# EAGLE board SparkFun_HX711_Load_Cell_Panel_v10 (EAGLE 6.6.0), part 1 of 3
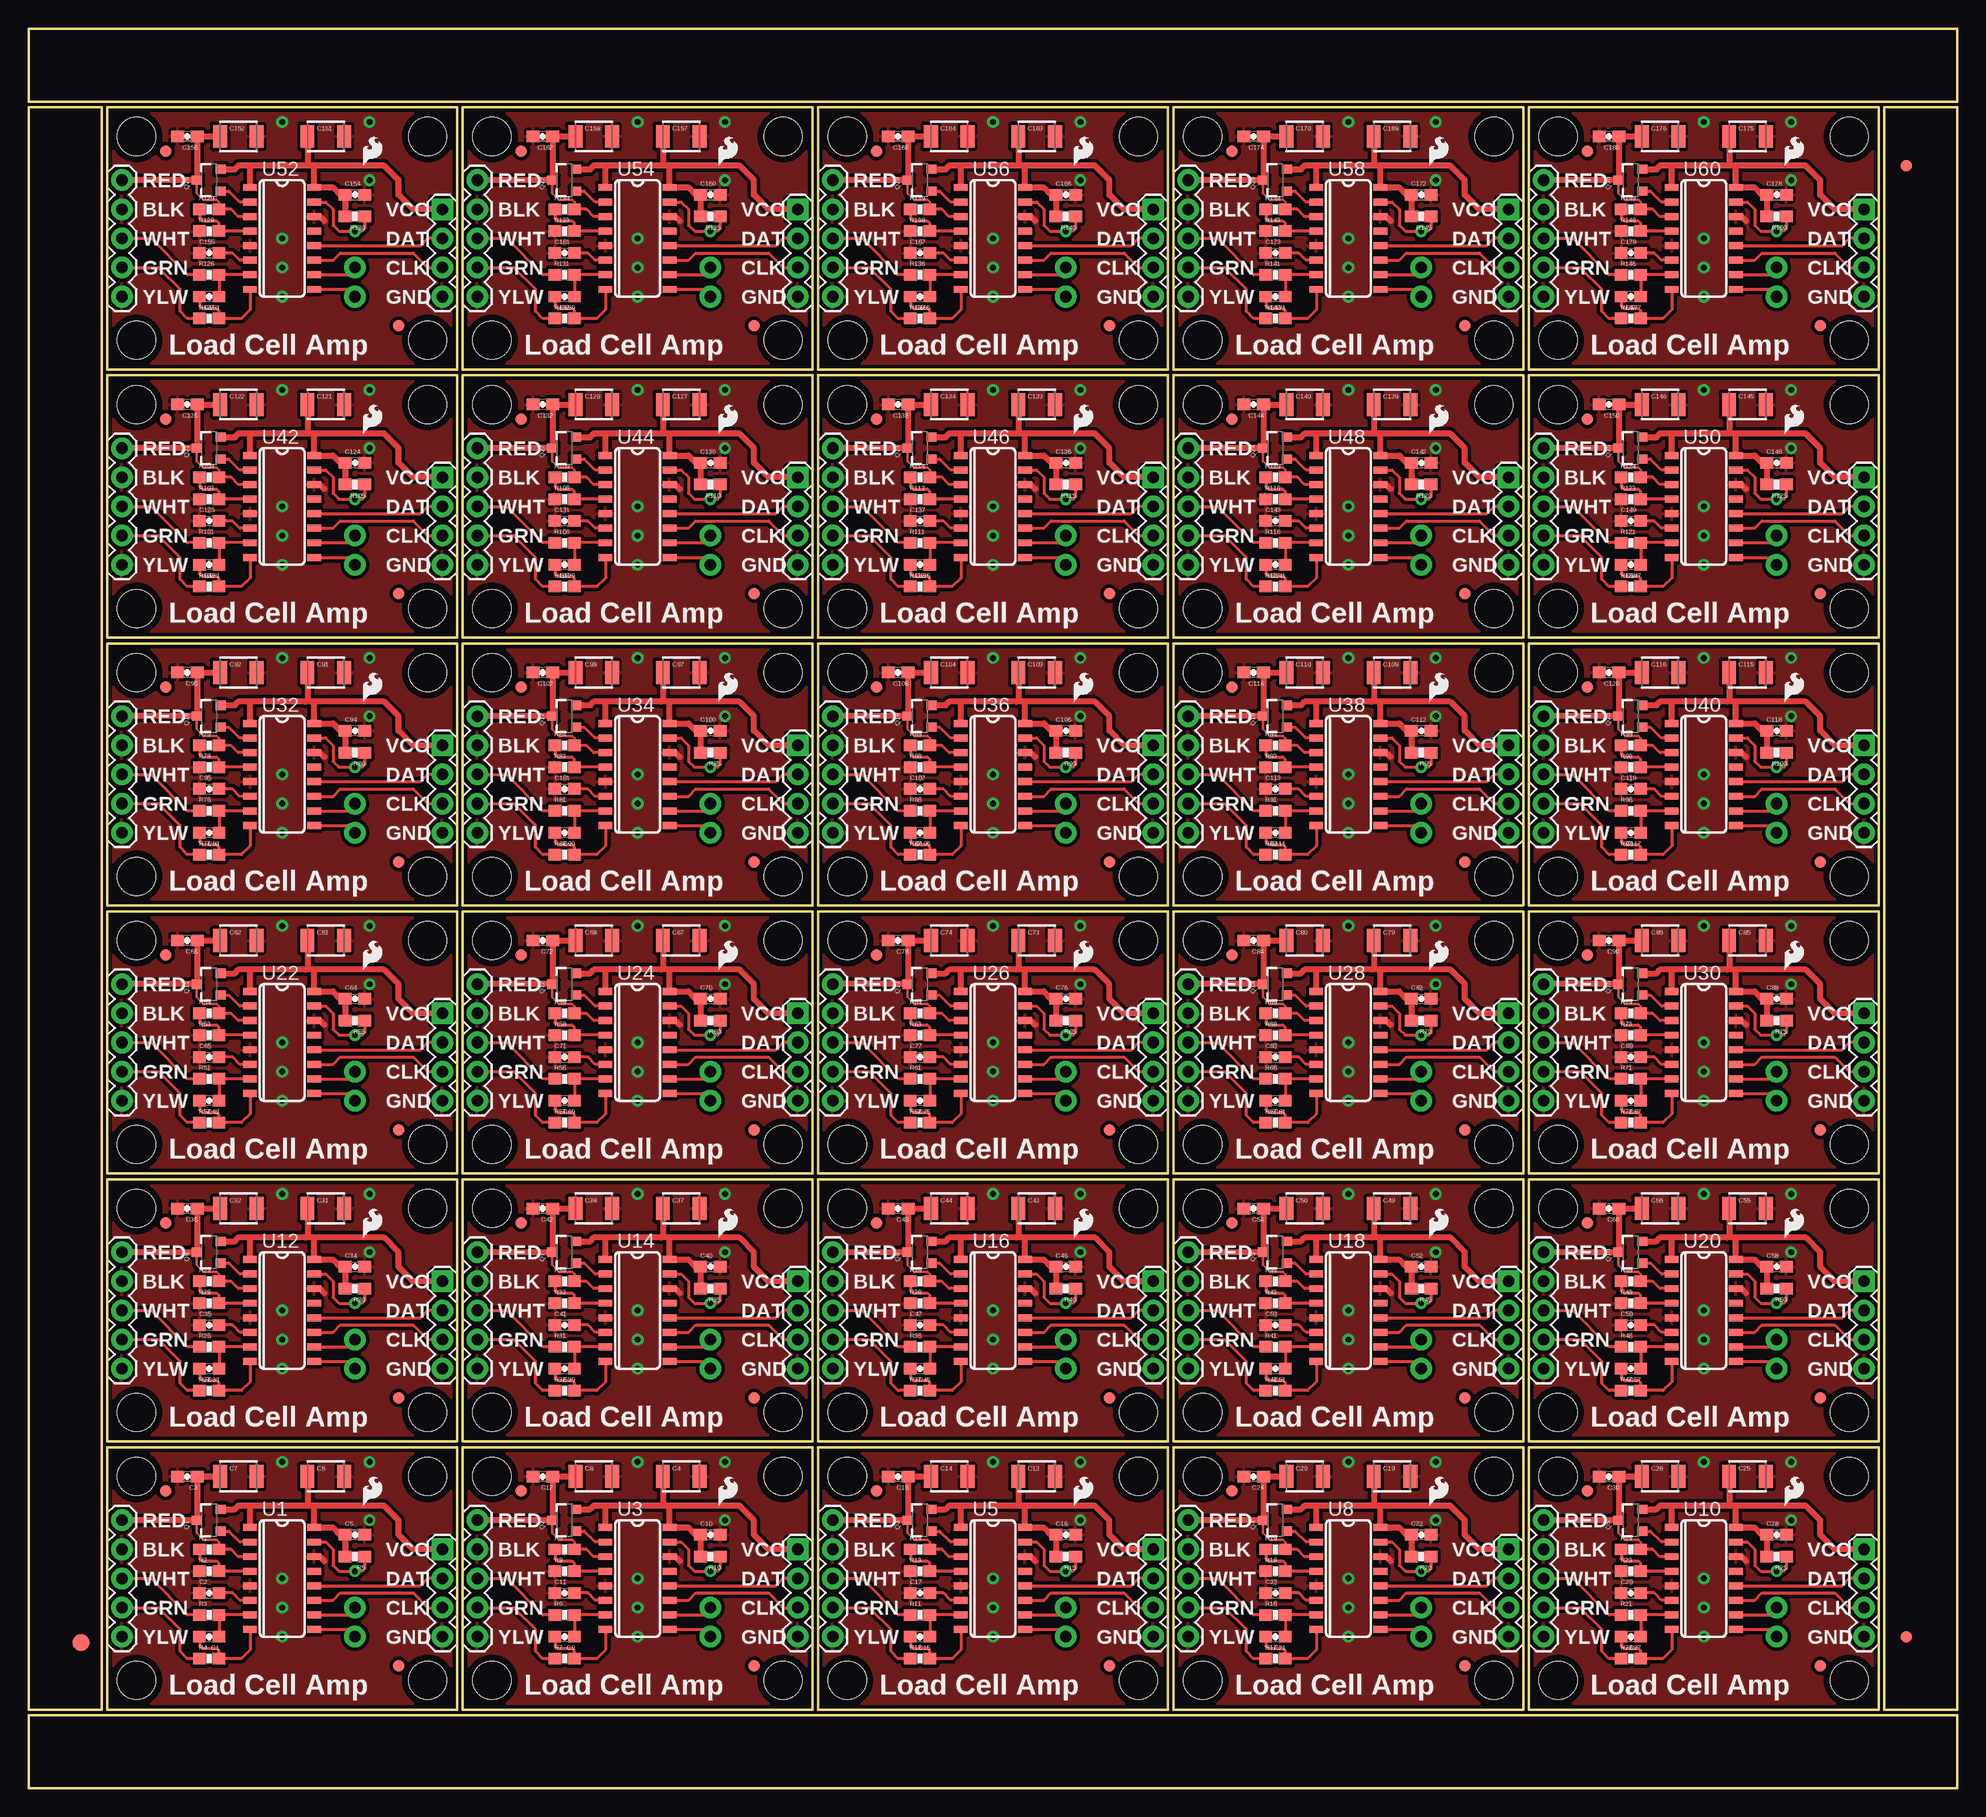
[diagram p0: board, top side]
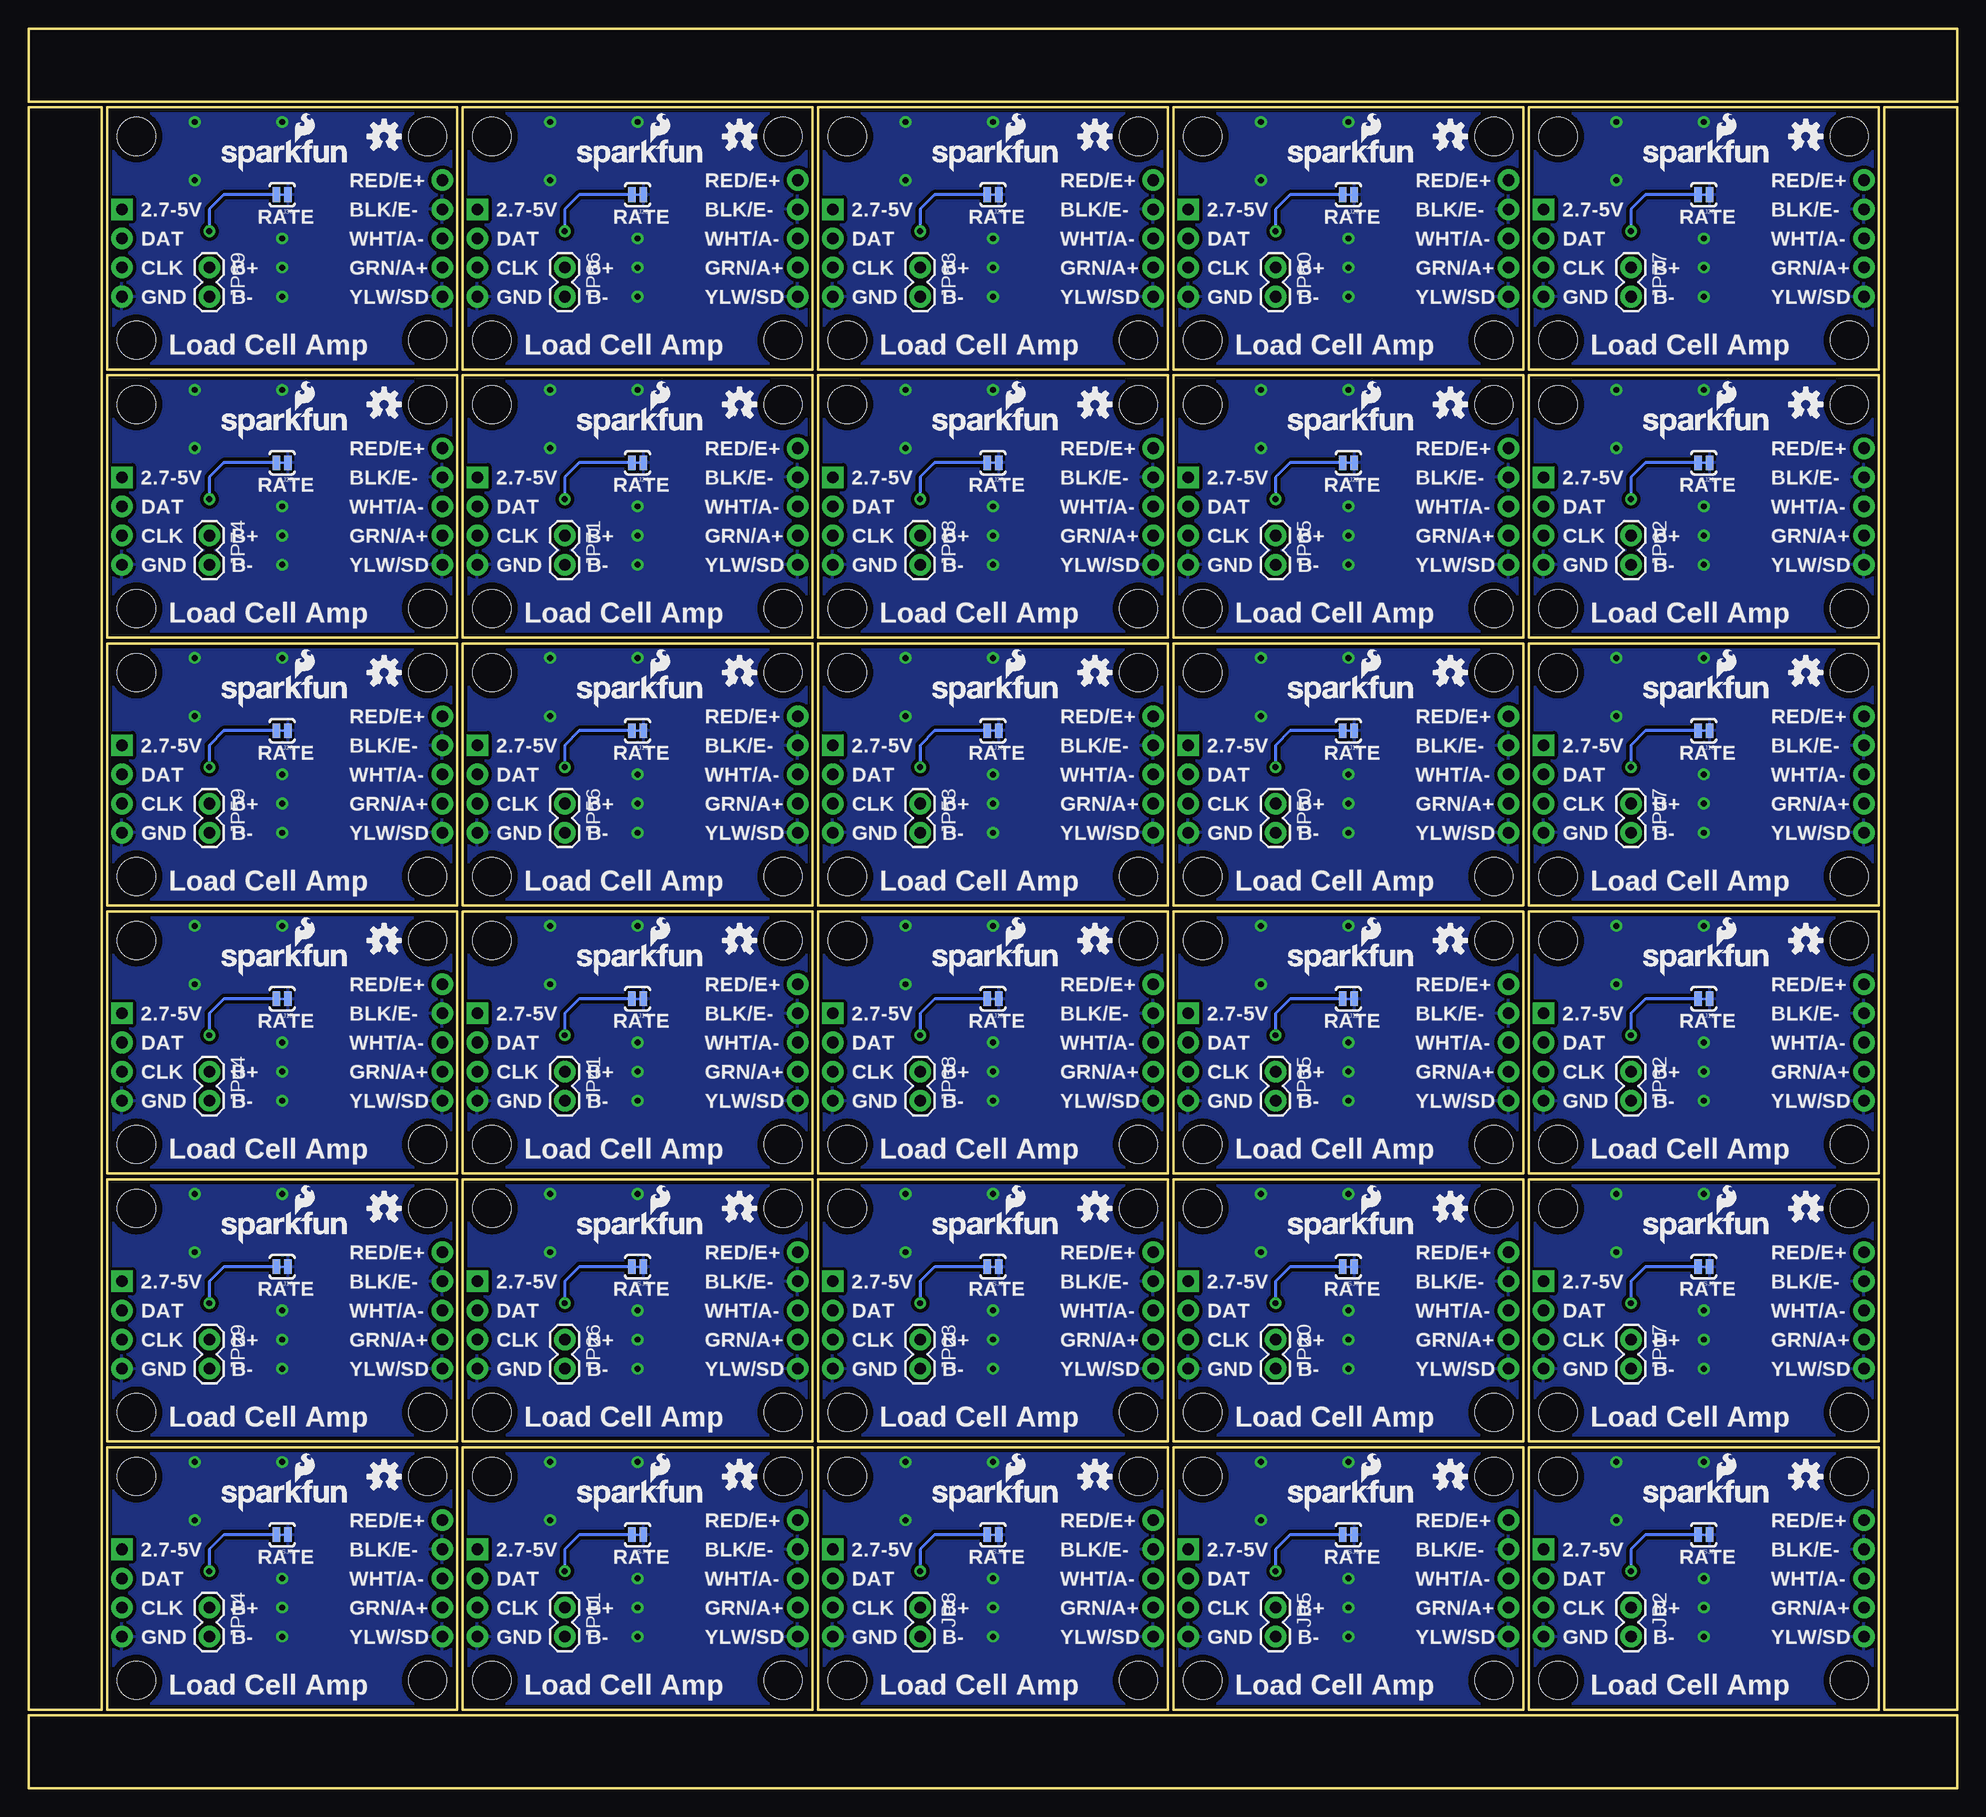
[diagram p1: board, bottom side, seen from below]

Size 168.15 x 153.42 mm. Coordinates in mm from the lower left corner, seen from the top.
Outline: 6.86,29.72 37.34,29.72 37.34,6.86 6.86,6.86 6.86,29.72
Outline: 37.85,29.72 68.33,29.72 68.33,6.86 37.85,6.86 37.85,29.72
Outline: 68.83,29.72 99.31,29.72 99.31,6.86 68.83,6.86 68.83,29.72
Outline: 99.82,29.72 130.3,29.72 130.3,6.86 99.82,6.86 99.82,29.72
Outline: 130.81,29.72 161.29,29.72 161.29,6.86 130.81,6.86 130.81,29.72
Outline: 6.86,53.09 37.34,53.09 37.34,30.23 6.86,30.23 6.86,53.09
Outline: 37.85,53.09 68.33,53.09 68.33,30.23 37.85,30.23 37.85,53.09
Outline: 68.83,53.09 99.31,53.09 99.31,30.23 68.83,30.23 68.83,53.09
Outline: 99.82,53.09 130.3,53.09 130.3,30.23 99.82,30.23 99.82,53.09
Outline: 130.81,53.09 161.29,53.09 161.29,30.23 130.81,30.23 130.81,53.09
Outline: 6.86,76.45 37.34,76.45 37.34,53.59 6.86,53.59 6.86,76.45
Outline: 37.85,76.45 68.33,76.45 68.33,53.59 37.85,53.59 37.85,76.45
Outline: 68.83,76.45 99.31,76.45 99.31,53.59 68.83,53.59 68.83,76.45
Outline: 99.82,76.45 130.3,76.45 130.3,53.59 99.82,53.59 99.82,76.45
Outline: 130.81,76.45 161.29,76.45 161.29,53.59 130.81,53.59 130.81,76.45
Outline: 6.86,99.82 37.34,99.82 37.34,76.96 6.86,76.96 6.86,99.82
Outline: 37.85,99.82 68.33,99.82 68.33,76.96 37.85,76.96 37.85,99.82
Outline: 68.83,99.82 99.31,99.82 99.31,76.96 68.83,76.96 68.83,99.82
Outline: 99.82,99.82 130.3,99.82 130.3,76.96 99.82,76.96 99.82,99.82
Outline: 130.81,99.82 161.29,99.82 161.29,76.96 130.81,76.96 130.81,99.82
Outline: 6.86,123.19 37.34,123.19 37.34,100.33 6.86,100.33 6.86,123.19
Outline: 37.85,123.19 68.33,123.19 68.33,100.33 37.85,100.33 37.85,123.19
Outline: 68.83,123.19 99.31,123.19 99.31,100.33 68.83,100.33 68.83,123.19
Outline: 99.82,123.19 130.3,123.19 130.3,100.33 99.82,100.33 99.82,123.19
Outline: 130.81,123.19 161.29,123.19 161.29,100.33 130.81,100.33 130.81,123.19
Outline: 6.86,146.56 37.34,146.56 37.34,123.7 6.86,123.7 6.86,146.56
Outline: 37.85,146.56 68.33,146.56 68.33,123.7 37.85,123.7 37.85,146.56
Outline: 68.83,146.56 99.31,146.56 99.31,123.7 68.83,123.7 68.83,146.56
Outline: 99.82,146.56 130.3,146.56 130.3,123.7 99.82,123.7 99.82,146.56
Outline: 130.81,146.56 161.29,146.56 161.29,123.7 130.81,123.7 130.81,146.56
Outline: 6.35,6.86 6.35,146.56 0,146.56 0,6.86 6.35,6.86
Outline: 0,6.35 0,0 168.15,0 168.15,6.35 0,6.35
Outline: 168.15,6.86 168.15,146.56 161.8,146.56 161.8,6.86 168.15,6.86
Outline: 168.15,147.07 168.15,153.42 0,153.42 0,147.07 168.15,147.07
Copper layers (1*16): Top 0.035mm / dielectric 1.5mm / Bottom 0.035mm
Design rules "default *": minimum track width 8mil, minimum drill 20mil, track to track 8mil, track to pad 8mil, pad to pad 8mil, via to via 8mil, smd to smd 8mil, copper to edge 8mil, drill to drill 8mil, minimum pad ring 12mil, minimum via ring 10mil, stop-mask expansion 4mil, vias tented up to drill 20mil, thermal gap 10mil

## Footprints (pad centres in the part's own frame; a part is rotated, then mirrored left to right if it is on the bottom)
0603-CAP = smd 1.1 x 1: 1 -0.85,0; 2 0.85,0
1210 = smd 1.2 x 2: 1 -1.6,0; 2 1.6,0
FIDUCIAL-1.5X3 = smd 1.5 x 1.5: 1 0,0
FIDUCIAL-1X2 = smd 1 x 1: 1 0,0
1X04 = drill 1.016 pad 1.88 square: 1 0,0 | drill 1.016 pad 1.88: 2 2.54,0; 3 5.08,0; 4 7.62,0
1X02 = drill 1.016 pad 1.88: 1 0,0; 2 2.54,0
1X05 = drill 1.016 pad 1.88: 1 0,0; 2 2.54,0; 3 5.08,0; 4 7.62,0; 5 10.16,0
SOT23-3 = smd 0.8 x 0.9: 1 -0.95,-1; 2 0.95,-1; 3 0,1.1
0603-RES = smd 1.1 x 1: 1 -0.85,0; 2 0.85,0
PAD-JUMPER-2-NC_BY_TRACE_YES_SILK = smd 0.635 x 1.27: 1 -0.508,0; 2 0.508,0
STAND-OFF = hole 3.302: 0,0
SO16 = smd 0.6 x 1.2: 1 -4.445,-2.8; 2 -3.175,-2.8; 3 -1.905,-2.8; 4 -0.635,-2.8; 5 0.635,-2.8; 6 1.905,-2.8; 7 3.175,-2.8; 8 4.445,-2.8; 9 4.445,2.8; 10 3.175,2.8; 11 1.905,2.8; 12 0.635,2.8; 13 -0.635,2.8; 14 -1.905,2.8; 15 -3.175,2.8; 16 -4.445,2.8

## Placement (x,y rotation side)
C1  0.1uF  [0603-CAP]  15.75,13.21 180 top
C2  0.1uF  [0603-CAP]  15.75,17.02 0 top
C3  0.1uF  [0603-CAP]  13.84,27.18 180 top
C4  10uF  [1210]  56.9,27.18 0 top
C5  0.1uF  [0603-CAP]  28.45,22.1 0 top
C6  10uF  [1210]  25.91,27.18 0 top
C7  10uF  [1210]  18.29,27.18 0 top
C8  10uF  [1210]  49.28,27.18 0 top
C9  0.1uF  [0603-CAP]  46.74,13.21 180 top
C10  0.1uF  [0603-CAP]  59.44,22.1 0 top
C11  0.1uF  [0603-CAP]  46.74,17.02 0 top
C12  0.1uF  [0603-CAP]  44.83,27.18 180 top
C13  10uF  [1210]  87.88,27.18 0 top
C14  10uF  [1210]  80.26,27.18 0 top
C15  0.1uF  [0603-CAP]  77.72,13.21 180 top
C16  0.1uF  [0603-CAP]  90.42,22.1 0 top
C17  0.1uF  [0603-CAP]  77.72,17.02 0 top
C18  0.1uF  [0603-CAP]  75.82,27.18 180 top
C19  10uF  [1210]  118.87,27.18 0 top
C20  10uF  [1210]  111.25,27.18 0 top
C21  0.1uF  [0603-CAP]  108.71,13.21 180 top
C22  0.1uF  [0603-CAP]  121.41,22.1 0 top
C23  0.1uF  [0603-CAP]  108.71,17.02 0 top
C24  0.1uF  [0603-CAP]  106.81,27.18 180 top
C25  10uF  [1210]  149.86,27.18 0 top
C26  10uF  [1210]  142.24,27.18 0 top
C27  0.1uF  [0603-CAP]  139.7,13.21 180 top
C28  0.1uF  [0603-CAP]  152.4,22.1 0 top
C29  0.1uF  [0603-CAP]  139.7,17.02 0 top
C30  0.1uF  [0603-CAP]  137.79,27.18 180 top
C31  10uF  [1210]  25.91,50.55 0 top
C32  10uF  [1210]  18.29,50.55 0 top
C33  0.1uF  [0603-CAP]  15.75,36.58 180 top
C34  0.1uF  [0603-CAP]  28.45,45.47 0 top
C35  0.1uF  [0603-CAP]  15.75,40.39 0 top
C36  0.1uF  [0603-CAP]  13.84,50.55 180 top
C37  10uF  [1210]  56.9,50.55 0 top
C38  10uF  [1210]  49.28,50.55 0 top
C39  0.1uF  [0603-CAP]  46.74,36.58 180 top
C40  0.1uF  [0603-CAP]  59.44,45.47 0 top
C41  0.1uF  [0603-CAP]  46.74,40.39 0 top
C42  0.1uF  [0603-CAP]  44.83,50.55 180 top
C43  10uF  [1210]  87.88,50.55 0 top
C44  10uF  [1210]  80.26,50.55 0 top
C45  0.1uF  [0603-CAP]  77.72,36.58 180 top
C46  0.1uF  [0603-CAP]  90.42,45.47 0 top
C47  0.1uF  [0603-CAP]  77.72,40.39 0 top
C48  0.1uF  [0603-CAP]  75.82,50.55 180 top
C49  10uF  [1210]  118.87,50.55 0 top
C50  10uF  [1210]  111.25,50.55 0 top
C51  0.1uF  [0603-CAP]  108.71,36.58 180 top
C52  0.1uF  [0603-CAP]  121.41,45.47 0 top
C53  0.1uF  [0603-CAP]  108.71,40.39 0 top
C54  0.1uF  [0603-CAP]  106.81,50.55 180 top
C55  10uF  [1210]  149.86,50.55 0 top
C56  10uF  [1210]  142.24,50.55 0 top
C57  0.1uF  [0603-CAP]  139.7,36.58 180 top
C58  0.1uF  [0603-CAP]  152.4,45.47 0 top
C59  0.1uF  [0603-CAP]  139.7,40.39 0 top
C60  0.1uF  [0603-CAP]  137.79,50.55 180 top
C61  10uF  [1210]  25.91,73.91 0 top
C62  10uF  [1210]  18.29,73.91 0 top
C63  0.1uF  [0603-CAP]  15.75,59.94 180 top
C64  0.1uF  [0603-CAP]  28.45,68.83 0 top
C65  0.1uF  [0603-CAP]  15.75,63.75 0 top
C66  0.1uF  [0603-CAP]  13.84,73.91 180 top
C67  10uF  [1210]  56.9,73.91 0 top
C68  10uF  [1210]  49.28,73.91 0 top
C69  0.1uF  [0603-CAP]  46.74,59.94 180 top
C70  0.1uF  [0603-CAP]  59.44,68.83 0 top
C71  0.1uF  [0603-CAP]  46.74,63.75 0 top
C72  0.1uF  [0603-CAP]  44.83,73.91 180 top
C73  10uF  [1210]  87.88,73.91 0 top
C74  10uF  [1210]  80.26,73.91 0 top
C75  0.1uF  [0603-CAP]  77.72,59.94 180 top
C76  0.1uF  [0603-CAP]  90.42,68.83 0 top
C77  0.1uF  [0603-CAP]  77.72,63.75 0 top
C78  0.1uF  [0603-CAP]  75.82,73.91 180 top
C79  10uF  [1210]  118.87,73.91 0 top
C80  10uF  [1210]  111.25,73.91 0 top
C81  0.1uF  [0603-CAP]  108.71,59.94 180 top
C82  0.1uF  [0603-CAP]  121.41,68.83 0 top
C83  0.1uF  [0603-CAP]  108.71,63.75 0 top
C84  0.1uF  [0603-CAP]  106.81,73.91 180 top
C85  10uF  [1210]  149.86,73.91 0 top
C86  10uF  [1210]  142.24,73.91 0 top
C87  0.1uF  [0603-CAP]  139.7,59.94 180 top
C88  0.1uF  [0603-CAP]  152.4,68.83 0 top
C89  0.1uF  [0603-CAP]  139.7,63.75 0 top
C90  0.1uF  [0603-CAP]  137.79,73.91 180 top
C91  10uF  [1210]  25.91,97.28 0 top
C92  10uF  [1210]  18.29,97.28 0 top
C93  0.1uF  [0603-CAP]  15.75,83.31 180 top
C94  0.1uF  [0603-CAP]  28.45,92.2 0 top
C95  0.1uF  [0603-CAP]  15.75,87.12 0 top
C96  0.1uF  [0603-CAP]  13.84,97.28 180 top
C97  10uF  [1210]  56.9,97.28 0 top
C98  10uF  [1210]  49.28,97.28 0 top
C99  0.1uF  [0603-CAP]  46.74,83.31 180 top
C100  0.1uF  [0603-CAP]  59.44,92.2 0 top
C101  0.1uF  [0603-CAP]  46.74,87.12 0 top
C102  0.1uF  [0603-CAP]  44.83,97.28 180 top
C103  10uF  [1210]  87.88,97.28 0 top
C104  10uF  [1210]  80.26,97.28 0 top
C105  0.1uF  [0603-CAP]  77.72,83.31 180 top
C106  0.1uF  [0603-CAP]  90.42,92.2 0 top
C107  0.1uF  [0603-CAP]  77.72,87.12 0 top
C108  0.1uF  [0603-CAP]  75.82,97.28 180 top
C109  10uF  [1210]  118.87,97.28 0 top
C110  10uF  [1210]  111.25,97.28 0 top
C111  0.1uF  [0603-CAP]  108.71,83.31 180 top
C112  0.1uF  [0603-CAP]  121.41,92.2 0 top
C113  0.1uF  [0603-CAP]  108.71,87.12 0 top
C114  0.1uF  [0603-CAP]  106.81,97.28 180 top
C115  10uF  [1210]  149.86,97.28 0 top
C116  10uF  [1210]  142.24,97.28 0 top
C117  0.1uF  [0603-CAP]  139.7,83.31 180 top
C118  0.1uF  [0603-CAP]  152.4,92.2 0 top
C119  0.1uF  [0603-CAP]  139.7,87.12 0 top
C120  0.1uF  [0603-CAP]  137.79,97.28 180 top
C121  10uF  [1210]  25.91,120.65 0 top
C122  10uF  [1210]  18.29,120.65 0 top
C123  0.1uF  [0603-CAP]  15.75,106.68 180 top
C124  0.1uF  [0603-CAP]  28.45,115.57 0 top
C125  0.1uF  [0603-CAP]  15.75,110.49 0 top
C126  0.1uF  [0603-CAP]  13.84,120.65 180 top
C127  10uF  [1210]  56.9,120.65 0 top
C128  10uF  [1210]  49.28,120.65 0 top
C129  0.1uF  [0603-CAP]  46.74,106.68 180 top
C130  0.1uF  [0603-CAP]  59.44,115.57 0 top
C131  0.1uF  [0603-CAP]  46.74,110.49 0 top
C132  0.1uF  [0603-CAP]  44.83,120.65 180 top
C133  10uF  [1210]  87.88,120.65 0 top
C134  10uF  [1210]  80.26,120.65 0 top
C135  0.1uF  [0603-CAP]  77.72,106.68 180 top
C136  0.1uF  [0603-CAP]  90.42,115.57 0 top
C137  0.1uF  [0603-CAP]  77.72,110.49 0 top
C138  0.1uF  [0603-CAP]  75.82,120.65 180 top
C139  10uF  [1210]  118.87,120.65 0 top
C140  10uF  [1210]  111.25,120.65 0 top
C141  0.1uF  [0603-CAP]  108.71,106.68 180 top
C142  0.1uF  [0603-CAP]  121.41,115.57 0 top
C143  0.1uF  [0603-CAP]  108.71,110.49 0 top
C144  0.1uF  [0603-CAP]  106.81,120.65 180 top
C145  10uF  [1210]  149.86,120.65 0 top
C146  10uF  [1210]  142.24,120.65 0 top
C147  0.1uF  [0603-CAP]  139.7,106.68 180 top
C148  0.1uF  [0603-CAP]  152.4,115.57 0 top
C149  0.1uF  [0603-CAP]  139.7,110.49 0 top
C150  0.1uF  [0603-CAP]  137.79,120.65 180 top
C151  10uF  [1210]  25.91,144.02 0 top
C152  10uF  [1210]  18.29,144.02 0 top
C153  0.1uF  [0603-CAP]  15.75,130.05 180 top
C154  0.1uF  [0603-CAP]  28.45,138.94 0 top
C155  0.1uF  [0603-CAP]  15.75,133.86 0 top
C156  0.1uF  [0603-CAP]  13.84,144.02 180 top
C157  10uF  [1210]  56.9,144.02 0 top
C158  10uF  [1210]  49.28,144.02 0 top
C159  0.1uF  [0603-CAP]  46.74,130.05 180 top
C160  0.1uF  [0603-CAP]  59.44,138.94 0 top
C161  0.1uF  [0603-CAP]  46.74,133.86 0 top
C162  0.1uF  [0603-CAP]  44.83,144.02 180 top
C163  10uF  [1210]  87.88,144.02 0 top
C164  10uF  [1210]  80.26,144.02 0 top
C165  0.1uF  [0603-CAP]  77.72,130.05 180 top
C166  0.1uF  [0603-CAP]  90.42,138.94 0 top
C167  0.1uF  [0603-CAP]  77.72,133.86 0 top
C168  0.1uF  [0603-CAP]  75.82,144.02 180 top
C169  10uF  [1210]  118.87,144.02 0 top
C170  10uF  [1210]  111.25,144.02 0 top
C171  0.1uF  [0603-CAP]  108.71,130.05 180 top
C172  0.1uF  [0603-CAP]  121.41,138.94 0 top
C173  0.1uF  [0603-CAP]  108.71,133.86 0 top
C174  0.1uF  [0603-CAP]  106.81,144.02 180 top
C175  10uF  [1210]  149.86,144.02 0 top
C176  10uF  [1210]  142.24,144.02 0 top
C177  0.1uF  [0603-CAP]  139.7,130.05 180 top
C178  0.1uF  [0603-CAP]  152.4,138.94 0 top
C179  0.1uF  [0603-CAP]  139.7,133.86 0 top
C180  0.1uF  [0603-CAP]  137.79,144.02 180 top
E$1  [FIDUCIAL-1.5X3]  4.57,12.7 0 top
E$4  [FIDUCIAL-1X2]  163.7,13.21 0 top
E$5  [FIDUCIAL-1X2]  163.7,141.48 180 top
FID1  FIDUCIAL1X2  [FIDUCIAL-1X2]  11.94,25.91 0 top
FID2  FIDUCIAL1X2  [FIDUCIAL-1X2]  32.26,10.67 0 top
FID3  FIDUCIAL1X2  [FIDUCIAL-1X2]  42.93,25.91 0 top
FID4  FIDUCIAL1X2  [FIDUCIAL-1X2]  63.25,10.67 0 top
FID5  FIDUCIAL1X2  [FIDUCIAL-1X2]  73.91,25.91 0 top
FID6  FIDUCIAL1X2  [FIDUCIAL-1X2]  94.23,10.67 0 top
FID7  FIDUCIAL1X2  [FIDUCIAL-1X2]  104.9,25.91 0 top
FID8  FIDUCIAL1X2  [FIDUCIAL-1X2]  125.22,10.67 0 top
FID9  FIDUCIAL1X2  [FIDUCIAL-1X2]  135.89,25.91 0 top
FID10  FIDUCIAL1X2  [FIDUCIAL-1X2]  156.21,10.67 0 top
FID11  FIDUCIAL1X2  [FIDUCIAL-1X2]  11.94,49.28 0 top
FID12  FIDUCIAL1X2  [FIDUCIAL-1X2]  32.26,34.04 0 top
FID13  FIDUCIAL1X2  [FIDUCIAL-1X2]  42.93,49.28 0 top
FID14  FIDUCIAL1X2  [FIDUCIAL-1X2]  63.25,34.04 0 top
FID15  FIDUCIAL1X2  [FIDUCIAL-1X2]  73.91,49.28 0 top
FID16  FIDUCIAL1X2  [FIDUCIAL-1X2]  94.23,34.04 0 top
FID17  FIDUCIAL1X2  [FIDUCIAL-1X2]  104.9,49.28 0 top
FID18  FIDUCIAL1X2  [FIDUCIAL-1X2]  125.22,34.04 0 top
FID19  FIDUCIAL1X2  [FIDUCIAL-1X2]  135.89,49.28 0 top
FID20  FIDUCIAL1X2  [FIDUCIAL-1X2]  156.21,34.04 0 top
FID21  FIDUCIAL1X2  [FIDUCIAL-1X2]  11.94,72.64 0 top
FID22  FIDUCIAL1X2  [FIDUCIAL-1X2]  32.26,57.4 0 top
FID23  FIDUCIAL1X2  [FIDUCIAL-1X2]  42.93,72.64 0 top
FID24  FIDUCIAL1X2  [FIDUCIAL-1X2]  63.25,57.4 0 top
FID25  FIDUCIAL1X2  [FIDUCIAL-1X2]  73.91,72.64 0 top
FID26  FIDUCIAL1X2  [FIDUCIAL-1X2]  94.23,57.4 0 top
FID27  FIDUCIAL1X2  [FIDUCIAL-1X2]  104.9,72.64 0 top
FID28  FIDUCIAL1X2  [FIDUCIAL-1X2]  125.22,57.4 0 top
FID29  FIDUCIAL1X2  [FIDUCIAL-1X2]  135.89,72.64 0 top
FID30  FIDUCIAL1X2  [FIDUCIAL-1X2]  156.21,57.4 0 top
FID31  FIDUCIAL1X2  [FIDUCIAL-1X2]  11.94,96.01 0 top
FID32  FIDUCIAL1X2  [FIDUCIAL-1X2]  32.26,80.77 0 top
FID33  FIDUCIAL1X2  [FIDUCIAL-1X2]  42.93,96.01 0 top
FID34  FIDUCIAL1X2  [FIDUCIAL-1X2]  63.25,80.77 0 top
FID35  FIDUCIAL1X2  [FIDUCIAL-1X2]  73.91,96.01 0 top
FID36  FIDUCIAL1X2  [FIDUCIAL-1X2]  94.23,80.77 0 top
FID37  FIDUCIAL1X2  [FIDUCIAL-1X2]  104.9,96.01 0 top
FID38  FIDUCIAL1X2  [FIDUCIAL-1X2]  125.22,80.77 0 top
FID39  FIDUCIAL1X2  [FIDUCIAL-1X2]  135.89,96.01 0 top
FID40  FIDUCIAL1X2  [FIDUCIAL-1X2]  156.21,80.77 0 top
FID41  FIDUCIAL1X2  [FIDUCIAL-1X2]  11.94,119.38 0 top
FID42  FIDUCIAL1X2  [FIDUCIAL-1X2]  32.26,104.14 0 top
FID43  FIDUCIAL1X2  [FIDUCIAL-1X2]  42.93,119.38 0 top
FID44  FIDUCIAL1X2  [FIDUCIAL-1X2]  63.25,104.14 0 top
FID45  FIDUCIAL1X2  [FIDUCIAL-1X2]  73.91,119.38 0 top
FID46  FIDUCIAL1X2  [FIDUCIAL-1X2]  94.23,104.14 0 top
FID47  FIDUCIAL1X2  [FIDUCIAL-1X2]  104.9,119.38 0 top
FID48  FIDUCIAL1X2  [FIDUCIAL-1X2]  125.22,104.14 0 top
FID49  FIDUCIAL1X2  [FIDUCIAL-1X2]  135.89,119.38 0 top
FID50  FIDUCIAL1X2  [FIDUCIAL-1X2]  156.21,104.14 0 top
FID51  FIDUCIAL1X2  [FIDUCIAL-1X2]  11.94,142.75 0 top
FID52  FIDUCIAL1X2  [FIDUCIAL-1X2]  32.26,127.51 0 top
FID53  FIDUCIAL1X2  [FIDUCIAL-1X2]  42.93,142.75 0 top
FID54  FIDUCIAL1X2  [FIDUCIAL-1X2]  63.25,127.51 0 top
FID55  FIDUCIAL1X2  [FIDUCIAL-1X2]  73.91,142.75 0 top
FID56  FIDUCIAL1X2  [FIDUCIAL-1X2]  94.23,127.51 0 top
FID57  FIDUCIAL1X2  [FIDUCIAL-1X2]  104.9,142.75 0 top
FID58  FIDUCIAL1X2  [FIDUCIAL-1X2]  125.22,127.51 0 top
FID59  FIDUCIAL1X2  [FIDUCIAL-1X2]  135.89,142.75 0 top
FID60  FIDUCIAL1X2  [FIDUCIAL-1X2]  156.21,127.51 0 top
JP1  [1X04]  36.07,20.83 270 top
JP2  [1X02]  28.45,15.75 270 bottom
JP3  [1X04]  67.06,20.83 270 top
JP4  [1X05]  8.13,13.21 90 top
JP5  [1X02]  59.44,15.75 270 bottom
JP6  [1X05]  39.12,13.21 90 top
JP7  [1X04]  98.04,20.83 270 top
JP8  [1X02]  90.42,15.75 270 bottom
JP9  [1X05]  70.1,13.21 90 top
JP10  [1X04]  129.03,20.83 270 top
JP11  [1X02]  121.41,15.75 270 bottom
JP12  [1X05]  101.09,13.21 90 top
JP13  [1X04]  160.02,20.83 270 top
JP14  [1X02]  152.4,15.75 270 bottom
JP15  [1X05]  132.08,13.21 90 top
JP16  [1X04]  36.07,44.2 270 top
JP17  [1X02]  28.45,39.12 270 bottom
JP18  [1X05]  8.13,36.58 90 top
JP19  [1X04]  67.06,44.2 270 top
JP20  [1X02]  59.44,39.12 270 bottom
JP21  [1X05]  39.12,36.58 90 top
JP22  [1X04]  98.04,44.2 270 top
JP23  [1X02]  90.42,39.12 270 bottom
JP24  [1X05]  70.1,36.58 90 top
JP25  [1X04]  129.03,44.2 270 top
JP26  [1X02]  121.41,39.12 270 bottom
JP27  [1X05]  101.09,36.58 90 top
JP28  [1X04]  160.02,44.2 270 top
JP29  [1X02]  152.4,39.12 270 bottom
JP30  [1X05]  132.08,36.58 90 top
JP31  [1X04]  36.07,67.56 270 top
JP32  [1X02]  28.45,62.48 270 bottom
JP33  [1X05]  8.13,59.94 90 top
JP34  [1X04]  67.06,67.56 270 top
JP35  [1X02]  59.44,62.48 270 bottom
JP36  [1X05]  39.12,59.94 90 top
JP37  [1X04]  98.04,67.56 270 top
JP38  [1X02]  90.42,62.48 270 bottom
JP39  [1X05]  70.1,59.94 90 top
JP40  [1X04]  129.03,67.56 270 top
JP41  [1X02]  121.41,62.48 270 bottom
JP42  [1X05]  101.09,59.94 90 top
JP43  [1X04]  160.02,67.56 270 top
JP44  [1X02]  152.4,62.48 270 bottom
JP45  [1X05]  132.08,59.94 90 top
JP46  [1X04]  36.07,90.93 270 top
JP47  [1X02]  28.45,85.85 270 bottom
JP48  [1X05]  8.13,83.31 90 top
JP49  [1X04]  67.06,90.93 270 top
JP50  [1X02]  59.44,85.85 270 bottom
JP51  [1X05]  39.12,83.31 90 top
JP52  [1X04]  98.04,90.93 270 top
JP53  [1X02]  90.42,85.85 270 bottom
JP54  [1X05]  70.1,83.31 90 top
JP55  [1X04]  129.03,90.93 270 top
JP56  [1X02]  121.41,85.85 270 bottom
JP57  [1X05]  101.09,83.31 90 top
JP58  [1X04]  160.02,90.93 270 top
JP59  [1X02]  152.4,85.85 270 bottom
JP60  [1X05]  132.08,83.31 90 top
JP61  [1X04]  36.07,114.3 270 top
JP62  [1X02]  28.45,109.22 270 bottom
JP63  [1X05]  8.13,106.68 90 top
JP64  [1X04]  67.06,114.3 270 top
JP65  [1X02]  59.44,109.22 270 bottom
JP66  [1X05]  39.12,106.68 90 top
JP67  [1X04]  98.04,114.3 270 top
JP68  [1X02]  90.42,109.22 270 bottom
JP69  [1X05]  70.1,106.68 90 top
JP70  [1X04]  129.03,114.3 270 top
JP71  [1X02]  121.41,109.22 270 bottom
JP72  [1X05]  101.09,106.68 90 top
JP73  [1X04]  160.02,114.3 270 top
JP74  [1X02]  152.4,109.22 270 bottom
JP75  [1X05]  132.08,106.68 90 top
JP76  [1X04]  36.07,137.67 270 top
JP77  [1X02]  28.45,132.59 270 bottom
JP78  [1X05]  8.13,130.05 90 top
JP79  [1X04]  67.06,137.67 270 top
JP80  [1X02]  59.44,132.59 270 bottom
JP81  [1X05]  39.12,130.05 90 top
JP82  [1X04]  98.04,137.67 270 top
JP83  [1X02]  90.42,132.59 270 bottom
JP84  [1X05]  70.1,130.05 90 top
JP85  [1X04]  129.03,137.67 270 top
JP86  [1X02]  121.41,132.59 270 bottom
JP87  [1X05]  101.09,130.05 90 top
JP88  [1X04]  160.02,137.67 270 top
JP89  [1X02]  152.4,132.59 270 bottom
JP90  [1X05]  132.08,130.05 90 top
LOGO1  SFE_LOGO_NAME_FLAME.1_INCH  [SFE_LOGO_NAME_FLAME_.1]  27.81,24 0 bottom
LOGO2  SFE_LOGO_NAME_FLAME.1_INCH  [SFE_LOGO_NAME_FLAME_.1]  58.8,24 0 bottom
LOGO3  SFE_LOGO_FLAME.1_INCH  [SFE_LOGO_FLAME_.1]  28.83,24.26 0 top
LOGO4  SFE_LOGO_FLAME.1_INCH  [SFE_LOGO_FLAME_.1]  59.82,24.26 0 top
LOGO5  SFE_LOGO_NAME_FLAME.1_INCH  [SFE_LOGO_NAME_FLAME_.1]  89.79,24 0 bottom
LOGO6  SFE_LOGO_FLAME.1_INCH  [SFE_LOGO_FLAME_.1]  90.81,24.26 0 top
LOGO7  SFE_LOGO_NAME_FLAME.1_INCH  [SFE_LOGO_NAME_FLAME_.1]  120.78,24 0 bottom
LOGO8  SFE_LOGO_FLAME.1_INCH  [SFE_LOGO_FLAME_.1]  121.79,24.26 0 top
LOGO9  SFE_LOGO_NAME_FLAME.1_INCH  [SFE_LOGO_NAME_FLAME_.1]  151.76,24 0 bottom
LOGO10  SFE_LOGO_FLAME.1_INCH  [SFE_LOGO_FLAME_.1]  152.78,24.26 0 top
LOGO11  SFE_LOGO_NAME_FLAME.1_INCH  [SFE_LOGO_NAME_FLAME_.1]  27.81,47.37 0 bottom
LOGO12  SFE_LOGO_FLAME.1_INCH  [SFE_LOGO_FLAME_.1]  28.83,47.62 0 top
LOGO13  SFE_LOGO_NAME_FLAME.1_INCH  [SFE_LOGO_NAME_FLAME_.1]  58.8,47.37 0 bottom
LOGO14  SFE_LOGO_FLAME.1_INCH  [SFE_LOGO_FLAME_.1]  59.82,47.62 0 top
LOGO15  SFE_LOGO_NAME_FLAME.1_INCH  [SFE_LOGO_NAME_FLAME_.1]  89.79,47.37 0 bottom
LOGO16  SFE_LOGO_FLAME.1_INCH  [SFE_LOGO_FLAME_.1]  90.81,47.62 0 top
LOGO17  SFE_LOGO_NAME_FLAME.1_INCH  [SFE_LOGO_NAME_FLAME_.1]  120.78,47.37 0 bottom
LOGO18  SFE_LOGO_FLAME.1_INCH  [SFE_LOGO_FLAME_.1]  121.79,47.62 0 top
LOGO19  SFE_LOGO_NAME_FLAME.1_INCH  [SFE_LOGO_NAME_FLAME_.1]  151.76,47.37 0 bottom
LOGO20  SFE_LOGO_FLAME.1_INCH  [SFE_LOGO_FLAME_.1]  152.78,47.62 0 top
LOGO21  SFE_LOGO_NAME_FLAME.1_INCH  [SFE_LOGO_NAME_FLAME_.1]  27.81,70.74 0 bottom
LOGO22  SFE_LOGO_FLAME.1_INCH  [SFE_LOGO_FLAME_.1]  28.83,70.99 0 top
LOGO23  SFE_LOGO_NAME_FLAME.1_INCH  [SFE_LOGO_NAME_FLAME_.1]  58.8,70.74 0 bottom
LOGO24  SFE_LOGO_FLAME.1_INCH  [SFE_LOGO_FLAME_.1]  59.82,70.99 0 top
LOGO25  SFE_LOGO_NAME_FLAME.1_INCH  [SFE_LOGO_NAME_FLAME_.1]  89.79,70.74 0 bottom
LOGO26  SFE_LOGO_FLAME.1_INCH  [SFE_LOGO_FLAME_.1]  90.81,70.99 0 top
LOGO27  SFE_LOGO_NAME_FLAME.1_INCH  [SFE_LOGO_NAME_FLAME_.1]  120.78,70.74 0 bottom
LOGO28  SFE_LOGO_FLAME.1_INCH  [SFE_LOGO_FLAME_.1]  121.79,70.99 0 top
LOGO29  SFE_LOGO_NAME_FLAME.1_INCH  [SFE_LOGO_NAME_FLAME_.1]  151.76,70.74 0 bottom
LOGO30  SFE_LOGO_FLAME.1_INCH  [SFE_LOGO_FLAME_.1]  152.78,70.99 0 top
LOGO31  SFE_LOGO_NAME_FLAME.1_INCH  [SFE_LOGO_NAME_FLAME_.1]  27.81,94.11 0 bottom
LOGO32  SFE_LOGO_FLAME.1_INCH  [SFE_LOGO_FLAME_.1]  28.83,94.36 0 top
LOGO33  SFE_LOGO_NAME_FLAME.1_INCH  [SFE_LOGO_NAME_FLAME_.1]  58.8,94.11 0 bottom
LOGO34  SFE_LOGO_FLAME.1_INCH  [SFE_LOGO_FLAME_.1]  59.82,94.36 0 top
LOGO35  SFE_LOGO_NAME_FLAME.1_INCH  [SFE_LOGO_NAME_FLAME_.1]  89.79,94.11 0 bottom
LOGO36  SFE_LOGO_FLAME.1_INCH  [SFE_LOGO_FLAME_.1]  90.81,94.36 0 top
LOGO37  SFE_LOGO_NAME_FLAME.1_INCH  [SFE_LOGO_NAME_FLAME_.1]  120.78,94.11 0 bottom
LOGO38  SFE_LOGO_FLAME.1_INCH  [SFE_LOGO_FLAME_.1]  121.79,94.36 0 top
LOGO39  SFE_LOGO_NAME_FLAME.1_INCH  [SFE_LOGO_NAME_FLAME_.1]  151.76,94.11 0 bottom
LOGO40  SFE_LOGO_FLAME.1_INCH  [SFE_LOGO_FLAME_.1]  152.78,94.36 0 top
LOGO41  SFE_LOGO_NAME_FLAME.1_INCH  [SFE_LOGO_NAME_FLAME_.1]  27.81,117.47 0 bottom
LOGO42  SFE_LOGO_FLAME.1_INCH  [SFE_LOGO_FLAME_.1]  28.83,117.73 0 top
LOGO43  SFE_LOGO_NAME_FLAME.1_INCH  [SFE_LOGO_NAME_FLAME_.1]  58.8,117.47 0 bottom
LOGO44  SFE_LOGO_FLAME.1_INCH  [SFE_LOGO_FLAME_.1]  59.82,117.73 0 top
LOGO45  SFE_LOGO_NAME_FLAME.1_INCH  [SFE_LOGO_NAME_FLAME_.1]  89.79,117.47 0 bottom
LOGO46  SFE_LOGO_FLAME.1_INCH  [SFE_LOGO_FLAME_.1]  90.81,117.73 0 top
LOGO47  SFE_LOGO_NAME_FLAME.1_INCH  [SFE_LOGO_NAME_FLAME_.1]  120.78,117.47 0 bottom
LOGO48  SFE_LOGO_FLAME.1_INCH  [SFE_LOGO_FLAME_.1]  121.79,117.73 0 top
LOGO49  SFE_LOGO_NAME_FLAME.1_INCH  [SFE_LOGO_NAME_FLAME_.1]  151.76,117.47 0 bottom
LOGO50  SFE_LOGO_FLAME.1_INCH  [SFE_LOGO_FLAME_.1]  152.78,117.73 0 top
LOGO51  SFE_LOGO_NAME_FLAME.1_INCH  [SFE_LOGO_NAME_FLAME_.1]  27.81,140.84 0 bottom
LOGO52  SFE_LOGO_FLAME.1_INCH  [SFE_LOGO_FLAME_.1]  28.83,141.1 0 top
LOGO53  SFE_LOGO_NAME_FLAME.1_INCH  [SFE_LOGO_NAME_FLAME_.1]  58.8,140.84 0 bottom
LOGO54  SFE_LOGO_FLAME.1_INCH  [SFE_LOGO_FLAME_.1]  59.82,141.1 0 top
LOGO55  SFE_LOGO_NAME_FLAME.1_INCH  [SFE_LOGO_NAME_FLAME_.1]  89.79,140.84 0 bottom
LOGO56  SFE_LOGO_FLAME.1_INCH  [SFE_LOGO_FLAME_.1]  90.81,141.1 0 top
LOGO57  SFE_LOGO_NAME_FLAME.1_INCH  [SFE_LOGO_NAME_FLAME_.1]  120.78,140.84 0 bottom
LOGO58  SFE_LOGO_FLAME.1_INCH  [SFE_LOGO_FLAME_.1]  121.79,141.1 0 top
LOGO59  SFE_LOGO_NAME_FLAME.1_INCH  [SFE_LOGO_NAME_FLAME_.1]  151.76,140.84 0 bottom
LOGO60  SFE_LOGO_FLAME.1_INCH  [SFE_LOGO_FLAME_.1]  152.78,141.1 0 top
Q1  MMBT4403  [SOT23-3]  15.75,23.37 90 top
Q2  MMBT4403  [SOT23-3]  46.74,23.37 90 top
Q3  MMBT4403  [SOT23-3]  77.72,23.37 90 top
Q4  MMBT4403  [SOT23-3]  108.71,23.37 90 top
Q5  MMBT4403  [SOT23-3]  139.7,23.37 90 top
Q6  MMBT4403  [SOT23-3]  15.75,46.74 90 top
Q7  MMBT4403  [SOT23-3]  46.74,46.74 90 top
Q8  MMBT4403  [SOT23-3]  77.72,46.74 90 top
Q9  MMBT4403  [SOT23-3]  108.71,46.74 90 top
Q10  MMBT4403  [SOT23-3]  139.7,46.74 90 top
Q11  MMBT4403  [SOT23-3]  15.75,70.1 90 top
Q12  MMBT4403  [SOT23-3]  46.74,70.1 90 top
Q13  MMBT4403  [SOT23-3]  77.72,70.1 90 top
Q14  MMBT4403  [SOT23-3]  108.71,70.1 90 top
Q15  MMBT4403  [SOT23-3]  139.7,70.1 90 top
Q16  MMBT4403  [SOT23-3]  15.75,93.47 90 top
Q17  MMBT4403  [SOT23-3]  46.74,93.47 90 top
Q18  MMBT4403  [SOT23-3]  77.72,93.47 90 top
Q19  MMBT4403  [SOT23-3]  108.71,93.47 90 top
Q20  MMBT4403  [SOT23-3]  139.7,93.47 90 top
Q21  MMBT4403  [SOT23-3]  15.75,116.84 90 top
Q22  MMBT4403  [SOT23-3]  46.74,116.84 90 top
Q23  MMBT4403  [SOT23-3]  77.72,116.84 90 top
Q24  MMBT4403  [SOT23-3]  108.71,116.84 90 top
Q25  MMBT4403  [SOT23-3]  139.7,116.84 90 top
Q26  MMBT4403  [SOT23-3]  15.75,140.21 90 top
Q27  MMBT4403  [SOT23-3]  46.74,140.21 90 top
Q28  MMBT4403  [SOT23-3]  77.72,140.21 90 top
Q29  MMBT4403  [SOT23-3]  108.71,140.21 90 top
Q30  MMBT4403  [SOT23-3]  139.7,140.21 90 top
R1  20K  [0603-RES]  15.75,20.83 0 top
R2  8.2K  [0603-RES]  15.75,18.92 0 top
R3  100  [0603-RES]  15.75,15.11 0 top
R4  100  [0603-RES]  15.75,11.3 0 top
R5  10K  [0603-RES]  28.45,20.19 180 top
R6  100  [0603-RES]  46.74,15.11 0 top
R7  100  [0603-RES]  46.74,11.3 0 top
R8  8.2K  [0603-RES]  46.74,18.92 0 top
R9  20K  [0603-RES]  46.74,20.83 0 top
R10  10K  [0603-RES]  59.44,20.19 180 top
R11  100  [0603-RES]  77.72,15.11 0 top
R12  100  [0603-RES]  77.72,11.3 0 top
R13  8.2K  [0603-RES]  77.72,18.92 0 top
R14  20K  [0603-RES]  77.72,20.83 0 top
R15  10K  [0603-RES]  90.42,20.19 180 top
R16  100  [0603-RES]  108.71,15.11 0 top
R17  100  [0603-RES]  108.71,11.3 0 top
R18  8.2K  [0603-RES]  108.71,18.92 0 top
R19  20K  [0603-RES]  108.71,20.83 0 top
R20  10K  [0603-RES]  121.41,20.19 180 top
R21  100  [0603-RES]  139.7,15.11 0 top
R22  100  [0603-RES]  139.7,11.3 0 top
R23  8.2K  [0603-RES]  139.7,18.92 0 top
R24  20K  [0603-RES]  139.7,20.83 0 top
R25  10K  [0603-RES]  152.4,20.19 180 top
R26  100  [0603-RES]  15.75,38.48 0 top
R27  100  [0603-RES]  15.75,34.67 0 top
R28  8.2K  [0603-RES]  15.75,42.29 0 top
R29  20K  [0603-RES]  15.75,44.2 0 top
R30  10K  [0603-RES]  28.45,43.56 180 top
R31  100  [0603-RES]  46.74,38.48 0 top
R32  100  [0603-RES]  46.74,34.67 0 top
R33  8.2K  [0603-RES]  46.74,42.29 0 top
R34  20K  [0603-RES]  46.74,44.2 0 top
R35  10K  [0603-RES]  59.44,43.56 180 top
R36  100  [0603-RES]  77.72,38.48 0 top
R37  100  [0603-RES]  77.72,34.67 0 top
R38  8.2K  [0603-RES]  77.72,42.29 0 top
R39  20K  [0603-RES]  77.72,44.2 0 top
R40  10K  [0603-RES]  90.42,43.56 180 top
R41  100  [0603-RES]  108.71,38.48 0 top
R42  100  [0603-RES]  108.71,34.67 0 top
R43  8.2K  [0603-RES]  108.71,42.29 0 top
R44  20K  [0603-RES]  108.71,44.2 0 top
R45  10K  [0603-RES]  121.41,43.56 180 top
R46  100  [0603-RES]  139.7,38.48 0 top
R47  100  [0603-RES]  139.7,34.67 0 top
R48  8.2K  [0603-RES]  139.7,42.29 0 top
R49  20K  [0603-RES]  139.7,44.2 0 top
R50  10K  [0603-RES]  152.4,43.56 180 top
R51  100  [0603-RES]  15.75,61.85 0 top
R52  100  [0603-RES]  15.75,58.04 0 top
R53  8.2K  [0603-RES]  15.75,65.66 0 top
R54  20K  [0603-RES]  15.75,67.56 0 top
R55  10K  [0603-RES]  28.45,66.93 180 top
R56  100  [0603-RES]  46.74,61.85 0 top
R57  100  [0603-RES]  46.74,58.04 0 top
R58  8.2K  [0603-RES]  46.74,65.66 0 top
R59  20K  [0603-RES]  46.74,67.56 0 top
R60  10K  [0603-RES]  59.44,66.93 180 top
R61  100  [0603-RES]  77.72,61.85 0 top
R62  100  [0603-RES]  77.72,58.04 0 top
R63  8.2K  [0603-RES]  77.72,65.66 0 top
R64  20K  [0603-RES]  77.72,67.56 0 top
R65  10K  [0603-RES]  90.42,66.93 180 top
R66  100  [0603-RES]  108.71,61.85 0 top
R67  100  [0603-RES]  108.71,58.04 0 top
R68  8.2K  [0603-RES]  108.71,65.66 0 top
R69  20K  [0603-RES]  108.71,67.56 0 top
R70  10K  [0603-RES]  121.41,66.93 180 top
R71  100  [0603-RES]  139.7,61.85 0 top
R72  100  [0603-RES]  139.7,58.04 0 top
R73  8.2K  [0603-RES]  139.7,65.66 0 top
R74  20K  [0603-RES]  139.7,67.56 0 top
R75  10K  [0603-RES]  152.4,66.93 180 top
R76  100  [0603-RES]  15.75,85.22 0 top
R77  100  [0603-RES]  15.75,81.41 0 top
R78  8.2K  [0603-RES]  15.75,89.03 0 top
R79  20K  [0603-RES]  15.75,90.93 0 top
R80  10K  [0603-RES]  28.45,90.3 180 top
R81  100  [0603-RES]  46.74,85.22 0 top
R82  100  [0603-RES]  46.74,81.41 0 top
R83  8.2K  [0603-RES]  46.74,89.03 0 top
R84  20K  [0603-RES]  46.74,90.93 0 top
R85  10K  [0603-RES]  59.44,90.3 180 top
R86  100  [0603-RES]  77.72,85.22 0 top
R87  100  [0603-RES]  77.72,81.41 0 top
R88  8.2K  [0603-RES]  77.72,89.03 0 top
R89  20K  [0603-RES]  77.72,90.93 0 top
R90  10K  [0603-RES]  90.42,90.3 180 top
R91  100  [0603-RES]  108.71,85.22 0 top
R92  100  [0603-RES]  108.71,81.41 0 top
R93  8.2K  [0603-RES]  108.71,89.03 0 top
R94  20K  [0603-RES]  108.71,90.93 0 top
R95  10K  [0603-RES]  121.41,90.3 180 top
R96  100  [0603-RES]  139.7,85.22 0 top
R97  100  [0603-RES]  139.7,81.41 0 top
R98  8.2K  [0603-RES]  139.7,89.03 0 top
R99  20K  [0603-RES]  139.7,90.93 0 top
R100  10K  [0603-RES]  152.4,90.3 180 top
R101  100  [0603-RES]  15.75,108.58 0 top
R102  100  [0603-RES]  15.75,104.78 0 top
R103  8.2K  [0603-RES]  15.75,112.39 0 top
R104  20K  [0603-RES]  15.75,114.3 0 top
R105  10K  [0603-RES]  28.45,113.67 180 top
R106  100  [0603-RES]  46.74,108.58 0 top
R107  100  [0603-RES]  46.74,104.78 0 top
R108  8.2K  [0603-RES]  46.74,112.39 0 top
R109  20K  [0603-RES]  46.74,114.3 0 top
R110  10K  [0603-RES]  59.44,113.67 180 top
R111  100  [0603-RES]  77.72,108.58 0 top
R112  100  [0603-RES]  77.72,104.78 0 top
R113  8.2K  [0603-RES]  77.72,112.39 0 top
R114  20K  [0603-RES]  77.72,114.3 0 top
R115  10K  [0603-RES]  90.42,113.67 180 top
R116  100  [0603-RES]  108.71,108.58 0 top
R117  100  [0603-RES]  108.71,104.78 0 top
R118  8.2K  [0603-RES]  108.71,112.39 0 top
R119  20K  [0603-RES]  108.71,114.3 0 top
R120  10K  [0603-RES]  121.41,113.67 180 top
R121  100  [0603-RES]  139.7,108.58 0 top
R122  100  [0603-RES]  139.7,104.78 0 top
R123  8.2K  [0603-RES]  139.7,112.39 0 top
R124  20K  [0603-RES]  139.7,114.3 0 top
R125  10K  [0603-RES]  152.4,113.67 180 top
R126  100  [0603-RES]  15.75,131.95 0 top
R127  100  [0603-RES]  15.75,128.14 0 top
R128  8.2K  [0603-RES]  15.75,135.76 0 top
R129  20K  [0603-RES]  15.75,137.67 0 top
R130  10K  [0603-RES]  28.45,137.03 180 top
R131  100  [0603-RES]  46.74,131.95 0 top
R132  100  [0603-RES]  46.74,128.14 0 top
R133  8.2K  [0603-RES]  46.74,135.76 0 top
R134  20K  [0603-RES]  46.74,137.67 0 top
R135  10K  [0603-RES]  59.44,137.03 180 top
R136  100  [0603-RES]  77.72,131.95 0 top
R137  100  [0603-RES]  77.72,128.14 0 top
R138  8.2K  [0603-RES]  77.72,135.76 0 top
R139  20K  [0603-RES]  77.72,137.67 0 top
R140  10K  [0603-RES]  90.42,137.03 180 top
R141  100  [0603-RES]  108.71,131.95 0 top
R142  100  [0603-RES]  108.71,128.14 0 top
R143  8.2K  [0603-RES]  108.71,135.76 0 top
R144  20K  [0603-RES]  108.71,137.67 0 top
R145  10K  [0603-RES]  121.41,137.03 180 top
R146  100  [0603-RES]  139.7,131.95 0 top
R147  100  [0603-RES]  139.7,128.14 0 top
R148  8.2K  [0603-RES]  139.7,135.76 0 top
R149  20K  [0603-RES]  139.7,137.67 0 top
R150  10K  [0603-RES]  152.4,137.03 180 top
SJ1  [PAD-JUMPER-2-NC_BY_TRACE_YES_SILK]  53.09,22.1 180 bottom
SJ2  [PAD-JUMPER-2-NC_BY_TRACE_YES_SILK]  22.1,22.1 180 bottom
SJ3  [PAD-JUMPER-2-NC_BY_TRACE_YES_SILK]  84.07,22.1 180 bottom
SJ4  [PAD-JUMPER-2-NC_BY_TRACE_YES_SILK]  115.06,22.1 180 bottom
SJ5  [PAD-JUMPER-2-NC_BY_TRACE_YES_SILK]  146.05,22.1 180 bottom
SJ6  [PAD-JUMPER-2-NC_BY_TRACE_YES_SILK]  22.1,45.47 180 bottom
SJ7  [PAD-JUMPER-2-NC_BY_TRACE_YES_SILK]  53.09,45.47 180 bottom
SJ8  [PAD-JUMPER-2-NC_BY_TRACE_YES_SILK]  84.07,45.47 180 bottom
SJ9  [PAD-JUMPER-2-NC_BY_TRACE_YES_SILK]  115.06,45.47 180 bottom
SJ10  [PAD-JUMPER-2-NC_BY_TRACE_YES_SILK]  146.05,45.47 180 bottom
SJ11  [PAD-JUMPER-2-NC_BY_TRACE_YES_SILK]  22.1,68.83 180 bottom
SJ12  [PAD-JUMPER-2-NC_BY_TRACE_YES_SILK]  53.09,68.83 180 bottom
SJ13  [PAD-JUMPER-2-NC_BY_TRACE_YES_SILK]  84.07,68.83 180 bottom
SJ14  [PAD-JUMPER-2-NC_BY_TRACE_YES_SILK]  115.06,68.83 180 bottom
SJ15  [PAD-JUMPER-2-NC_BY_TRACE_YES_SILK]  146.05,68.83 180 bottom
SJ16  [PAD-JUMPER-2-NC_BY_TRACE_YES_SILK]  22.1,92.2 180 bottom
SJ17  [PAD-JUMPER-2-NC_BY_TRACE_YES_SILK]  53.09,92.2 180 bottom
SJ18  [PAD-JUMPER-2-NC_BY_TRACE_YES_SILK]  84.07,92.2 180 bottom
SJ19  [PAD-JUMPER-2-NC_BY_TRACE_YES_SILK]  115.06,92.2 180 bottom
SJ20  [PAD-JUMPER-2-NC_BY_TRACE_YES_SILK]  146.05,92.2 180 bottom
SJ21  [PAD-JUMPER-2-NC_BY_TRACE_YES_SILK]  22.1,115.57 180 bottom
SJ22  [PAD-JUMPER-2-NC_BY_TRACE_YES_SILK]  53.09,115.57 180 bottom
SJ23  [PAD-JUMPER-2-NC_BY_TRACE_YES_SILK]  84.07,115.57 180 bottom
SJ24  [PAD-JUMPER-2-NC_BY_TRACE_YES_SILK]  115.06,115.57 180 bottom
SJ25  [PAD-JUMPER-2-NC_BY_TRACE_YES_SILK]  146.05,115.57 180 bottom
SJ26  [PAD-JUMPER-2-NC_BY_TRACE_YES_SILK]  22.1,138.94 180 bottom
SJ27  [PAD-JUMPER-2-NC_BY_TRACE_YES_SILK]  53.09,138.94 180 bottom
SJ28  [PAD-JUMPER-2-NC_BY_TRACE_YES_SILK]  84.07,138.94 180 bottom
SJ29  [PAD-JUMPER-2-NC_BY_TRACE_YES_SILK]  115.06,138.94 180 bottom
SJ30  [PAD-JUMPER-2-NC_BY_TRACE_YES_SILK]  146.05,138.94 180 bottom
STANDOFF1  STAND-OFF  [STAND-OFF]  9.4,9.4 0 top
STANDOFF2  STAND-OFF  [STAND-OFF]  34.8,9.4 0 top
STANDOFF3  STAND-OFF  [STAND-OFF]  9.4,27.18 0 top
STANDOFF4  STAND-OFF  [STAND-OFF]  34.8,27.18 0 top
STANDOFF5  STAND-OFF  [STAND-OFF]  40.39,9.4 0 top
STANDOFF6  STAND-OFF  [STAND-OFF]  65.79,9.4 0 top
STANDOFF7  STAND-OFF  [STAND-OFF]  40.39,27.18 0 top
STANDOFF8  STAND-OFF  [STAND-OFF]  65.79,27.18 0 top
STANDOFF9  STAND-OFF  [STAND-OFF]  71.37,9.4 0 top
STANDOFF10  STAND-OFF  [STAND-OFF]  96.77,9.4 0 top
STANDOFF11  STAND-OFF  [STAND-OFF]  71.37,27.18 0 top
STANDOFF12  STAND-OFF  [STAND-OFF]  96.77,27.18 0 top
STANDOFF13  STAND-OFF  [STAND-OFF]  102.36,9.4 0 top
STANDOFF14  STAND-OFF  [STAND-OFF]  127.76,9.4 0 top
STANDOFF15  STAND-OFF  [STAND-OFF]  102.36,27.18 0 top
STANDOFF16  STAND-OFF  [STAND-OFF]  127.76,27.18 0 top
STANDOFF17  STAND-OFF  [STAND-OFF]  133.35,9.4 0 top
STANDOFF18  STAND-OFF  [STAND-OFF]  158.75,9.4 0 top
STANDOFF19  STAND-OFF  [STAND-OFF]  133.35,27.18 0 top
STANDOFF20  STAND-OFF  [STAND-OFF]  158.75,27.18 0 top
STANDOFF21  STAND-OFF  [STAND-OFF]  9.4,32.77 0 top
STANDOFF22  STAND-OFF  [STAND-OFF]  34.8,32.77 0 top
STANDOFF23  STAND-OFF  [STAND-OFF]  9.4,50.55 0 top
STANDOFF24  STAND-OFF  [STAND-OFF]  34.8,50.55 0 top
STANDOFF25  STAND-OFF  [STAND-OFF]  40.39,32.77 0 top
STANDOFF26  STAND-OFF  [STAND-OFF]  65.79,32.77 0 top
STANDOFF27  STAND-OFF  [STAND-OFF]  40.39,50.55 0 top
STANDOFF28  STAND-OFF  [STAND-OFF]  65.79,50.55 0 top
STANDOFF29  STAND-OFF  [STAND-OFF]  71.37,32.77 0 top
STANDOFF30  STAND-OFF  [STAND-OFF]  96.77,32.77 0 top
STANDOFF31  STAND-OFF  [STAND-OFF]  71.37,50.55 0 top
STANDOFF32  STAND-OFF  [STAND-OFF]  96.77,50.55 0 top
STANDOFF33  STAND-OFF  [STAND-OFF]  102.36,32.77 0 top
STANDOFF34  STAND-OFF  [STAND-OFF]  127.76,32.77 0 top
STANDOFF35  STAND-OFF  [STAND-OFF]  102.36,50.55 0 top
STANDOFF36  STAND-OFF  [STAND-OFF]  127.76,50.55 0 top
STANDOFF37  STAND-OFF  [STAND-OFF]  133.35,32.77 0 top
STANDOFF38  STAND-OFF  [STAND-OFF]  158.75,32.77 0 top
STANDOFF39  STAND-OFF  [STAND-OFF]  133.35,50.55 0 top
STANDOFF40  STAND-OFF  [STAND-OFF]  158.75,50.55 0 top
STANDOFF41  STAND-OFF  [STAND-OFF]  9.4,56.13 0 top
STANDOFF42  STAND-OFF  [STAND-OFF]  34.8,56.13 0 top
STANDOFF43  STAND-OFF  [STAND-OFF]  9.4,73.91 0 top
STANDOFF44  STAND-OFF  [STAND-OFF]  34.8,73.91 0 top
STANDOFF45  STAND-OFF  [STAND-OFF]  40.39,56.13 0 top
STANDOFF46  STAND-OFF  [STAND-OFF]  65.79,56.13 0 top
STANDOFF47  STAND-OFF  [STAND-OFF]  40.39,73.91 0 top
STANDOFF48  STAND-OFF  [STAND-OFF]  65.79,73.91 0 top
STANDOFF49  STAND-OFF  [STAND-OFF]  71.37,56.13 0 top
STANDOFF50  STAND-OFF  [STAND-OFF]  96.77,56.13 0 top
STANDOFF51  STAND-OFF  [STAND-OFF]  71.37,73.91 0 top
STANDOFF52  STAND-OFF  [STAND-OFF]  96.77,73.91 0 top
STANDOFF53  STAND-OFF  [STAND-OFF]  102.36,56.13 0 top
STANDOFF54  STAND-OFF  [STAND-OFF]  127.76,56.13 0 top
STANDOFF55  STAND-OFF  [STAND-OFF]  102.36,73.91 0 top
STANDOFF56  STAND-OFF  [STAND-OFF]  127.76,73.91 0 top
STANDOFF57  STAND-OFF  [STAND-OFF]  133.35,56.13 0 top
STANDOFF58  STAND-OFF  [STAND-OFF]  158.75,56.13 0 top
STANDOFF59  STAND-OFF  [STAND-OFF]  133.35,73.91 0 top
STANDOFF60  STAND-OFF  [STAND-OFF]  158.75,73.91 0 top
STANDOFF61  STAND-OFF  [STAND-OFF]  9.4,79.5 0 top
STANDOFF62  STAND-OFF  [STAND-OFF]  34.8,79.5 0 top
STANDOFF63  STAND-OFF  [STAND-OFF]  9.4,97.28 0 top
STANDOFF64  STAND-OFF  [STAND-OFF]  34.8,97.28 0 top
STANDOFF65  STAND-OFF  [STAND-OFF]  40.39,79.5 0 top
STANDOFF66  STAND-OFF  [STAND-OFF]  65.79,79.5 0 top
STANDOFF67  STAND-OFF  [STAND-OFF]  40.39,97.28 0 top
STANDOFF68  STAND-OFF  [STAND-OFF]  65.79,97.28 0 top
STANDOFF69  STAND-OFF  [STAND-OFF]  71.37,79.5 0 top
STANDOFF70  STAND-OFF  [STAND-OFF]  96.77,79.5 0 top
STANDOFF71  STAND-OFF  [STAND-OFF]  71.37,97.28 0 top
STANDOFF72  STAND-OFF  [STAND-OFF]  96.77,97.28 0 top
STANDOFF73  STAND-OFF  [STAND-OFF]  102.36,79.5 0 top
STANDOFF74  STAND-OFF  [STAND-OFF]  127.76,79.5 0 top
STANDOFF75  STAND-OFF  [STAND-OFF]  102.36,97.28 0 top
STANDOFF76  STAND-OFF  [STAND-OFF]  127.76,97.28 0 top
STANDOFF77  STAND-OFF  [STAND-OFF]  133.35,79.5 0 top
STANDOFF78  STAND-OFF  [STAND-OFF]  158.75,79.5 0 top
STANDOFF79  STAND-OFF  [STAND-OFF]  133.35,97.28 0 top
STANDOFF80  STAND-OFF  [STAND-OFF]  158.75,97.28 0 top
STANDOFF81  STAND-OFF  [STAND-OFF]  9.4,102.87 0 top
STANDOFF82  STAND-OFF  [STAND-OFF]  34.8,102.87 0 top
STANDOFF83  STAND-OFF  [STAND-OFF]  9.4,120.65 0 top
STANDOFF84  STAND-OFF  [STAND-OFF]  34.8,120.65 0 top
STANDOFF85  STAND-OFF  [STAND-OFF]  40.39,102.87 0 top
STANDOFF86  STAND-OFF  [STAND-OFF]  65.79,102.87 0 top
STANDOFF87  STAND-OFF  [STAND-OFF]  40.39,120.65 0 top
STANDOFF88  STAND-OFF  [STAND-OFF]  65.79,120.65 0 top
STANDOFF89  STAND-OFF  [STAND-OFF]  71.37,102.87 0 top
STANDOFF90  STAND-OFF  [STAND-OFF]  96.77,102.87 0 top
STANDOFF91  STAND-OFF  [STAND-OFF]  71.37,120.65 0 top
STANDOFF92  STAND-OFF  [STAND-OFF]  96.77,120.65 0 top
STANDOFF93  STAND-OFF  [STAND-OFF]  102.36,102.87 0 top
STANDOFF94  STAND-OFF  [STAND-OFF]  127.76,102.87 0 top
STANDOFF95  STAND-OFF  [STAND-OFF]  102.36,120.65 0 top
STANDOFF96  STAND-OFF  [STAND-OFF]  127.76,120.65 0 top
STANDOFF97  STAND-OFF  [STAND-OFF]  133.35,102.87 0 top
STANDOFF98  STAND-OFF  [STAND-OFF]  158.75,102.87 0 top
STANDOFF99  STAND-OFF  [STAND-OFF]  133.35,120.65 0 top
STANDOFF100  STAND-OFF  [STAND-OFF]  158.75,120.65 0 top
STANDOFF101  STAND-OFF  [STAND-OFF]  9.4,126.24 0 top
STANDOFF102  STAND-OFF  [STAND-OFF]  34.8,126.24 0 top
STANDOFF103  STAND-OFF  [STAND-OFF]  9.4,144.02 0 top
STANDOFF104  STAND-OFF  [STAND-OFF]  34.8,144.02 0 top
STANDOFF105  STAND-OFF  [STAND-OFF]  40.39,126.24 0 top
STANDOFF106  STAND-OFF  [STAND-OFF]  65.79,126.24 0 top
STANDOFF107  STAND-OFF  [STAND-OFF]  40.39,144.02 0 top
STANDOFF108  STAND-OFF  [STAND-OFF]  65.79,144.02 0 top
STANDOFF109  STAND-OFF  [STAND-OFF]  71.37,126.24 0 top
STANDOFF110  STAND-OFF  [STAND-OFF]  96.77,126.24 0 top
STANDOFF111  STAND-OFF  [STAND-OFF]  71.37,144.02 0 top
STANDOFF112  STAND-OFF  [STAND-OFF]  96.77,144.02 0 top
STANDOFF113  STAND-OFF  [STAND-OFF]  102.36,126.24 0 top
STANDOFF114  STAND-OFF  [STAND-OFF]  127.76,126.24 0 top
STANDOFF115  STAND-OFF  [STAND-OFF]  102.36,144.02 0 top
STANDOFF116  STAND-OFF  [STAND-OFF]  127.76,144.02 0 top
STANDOFF117  STAND-OFF  [STAND-OFF]  133.35,126.24 0 top
STANDOFF118  STAND-OFF  [STAND-OFF]  158.75,126.24 0 top
STANDOFF119  STAND-OFF  [STAND-OFF]  133.35,144.02 0 top
STANDOFF120  STAND-OFF  [STAND-OFF]  158.75,144.02 0 top
U1  HX711  [SO16]  22.1,18.29 270 top
U2  OSHW-LOGOS  [OSHW-LOGO-S]  44.2,27.18 0 bottom
U3  HX711  [SO16]  53.09,18.29 270 top
U4  OSHW-LOGOS  [OSHW-LOGO-S]  75.18,27.18 0 bottom
U5  HX711  [SO16]  84.07,18.29 270 top
U6  OSHW-LOGOS  [OSHW-LOGO-S]  106.17,27.18 0 bottom
U7  OSHW-LOGOS  [OSHW-LOGO-S]  13.21,27.18 0 bottom
U8  HX711  [SO16]  115.06,18.29 270 top
U9  OSHW-LOGOS  [OSHW-LOGO-S]  137.16,27.18 0 bottom
U10  HX711  [SO16]  146.05,18.29 270 top
U11  OSHW-LOGOS  [OSHW-LOGO-S]  13.21,50.55 0 bottom
U12  HX711  [SO16]  22.1,41.66 270 top
U13  OSHW-LOGOS  [OSHW-LOGO-S]  44.2,50.55 0 bottom
U14  HX711  [SO16]  53.09,41.66 270 top
U15  OSHW-LOGOS  [OSHW-LOGO-S]  75.18,50.55 0 bottom
U16  HX711  [SO16]  84.07,41.66 270 top
U17  OSHW-LOGOS  [OSHW-LOGO-S]  106.17,50.55 0 bottom
U18  HX711  [SO16]  115.06,41.66 270 top
U19  OSHW-LOGOS  [OSHW-LOGO-S]  137.16,50.55 0 bottom
U20  HX711  [SO16]  146.05,41.66 270 top
U21  OSHW-LOGOS  [OSHW-LOGO-S]  13.21,73.91 0 bottom
U22  HX711  [SO16]  22.1,65.02 270 top
U23  OSHW-LOGOS  [OSHW-LOGO-S]  44.2,73.91 0 bottom
U24  HX711  [SO16]  53.09,65.02 270 top
U25  OSHW-LOGOS  [OSHW-LOGO-S]  75.18,73.91 0 bottom
U26  HX711  [SO16]  84.07,65.02 270 top
U27  OSHW-LOGOS  [OSHW-LOGO-S]  106.17,73.91 0 bottom
U28  HX711  [SO16]  115.06,65.02 270 top
U29  OSHW-LOGOS  [OSHW-LOGO-S]  137.16,73.91 0 bottom
U30  HX711  [SO16]  146.05,65.02 270 top
U31  OSHW-LOGOS  [OSHW-LOGO-S]  13.21,97.28 0 bottom
U32  HX711  [SO16]  22.1,88.39 270 top
U33  OSHW-LOGOS  [OSHW-LOGO-S]  44.2,97.28 0 bottom
U34  HX711  [SO16]  53.09,88.39 270 top
U35  OSHW-LOGOS  [OSHW-LOGO-S]  75.18,97.28 0 bottom
U36  HX711  [SO16]  84.07,88.39 270 top
U37  OSHW-LOGOS  [OSHW-LOGO-S]  106.17,97.28 0 bottom
U38  HX711  [SO16]  115.06,88.39 270 top
U39  OSHW-LOGOS  [OSHW-LOGO-S]  137.16,97.28 0 bottom
U40  HX711  [SO16]  146.05,88.39 270 top
U41  OSHW-LOGOS  [OSHW-LOGO-S]  13.21,120.65 0 bottom
U42  HX711  [SO16]  22.1,111.76 270 top
U43  OSHW-LOGOS  [OSHW-LOGO-S]  44.2,120.65 0 bottom
U44  HX711  [SO16]  53.09,111.76 270 top
U45  OSHW-LOGOS  [OSHW-LOGO-S]  75.18,120.65 0 bottom
U46  HX711  [SO16]  84.07,111.76 270 top
U47  OSHW-LOGOS  [OSHW-LOGO-S]  106.17,120.65 0 bottom
U48  HX711  [SO16]  115.06,111.76 270 top
U49  OSHW-LOGOS  [OSHW-LOGO-S]  137.16,120.65 0 bottom
U50  HX711  [SO16]  146.05,111.76 270 top
U51  OSHW-LOGOS  [OSHW-LOGO-S]  13.21,144.02 0 bottom
U52  HX711  [SO16]  22.1,135.13 270 top
U53  OSHW-LOGOS  [OSHW-LOGO-S]  44.2,144.02 0 bottom
U54  HX711  [SO16]  53.09,135.13 270 top
U55  OSHW-LOGOS  [OSHW-LOGO-S]  75.18,144.02 0 bottom
U56  HX711  [SO16]  84.07,135.13 270 top
U57  OSHW-LOGOS  [OSHW-LOGO-S]  106.17,144.02 0 bottom
U58  HX711  [SO16]  115.06,135.13 270 top
U59  OSHW-LOGOS  [OSHW-LOGO-S]  137.16,144.02 0 bottom
U60  HX711  [SO16]  146.05,135.13 270 top

## Library data of the parts
C1-C3 C5 C9-C12 C15-C18 C21-C24 C27-C30 C33-C36 C39-C42 C45-C48 C51-C54 C57-C60 C63-C66 C69-C72 C75-C78 C81-C84 C87-C90 C93-C96 C99-C102 C105-C108 C111-C114 C117-C120 C123-C126 C129-C132 C135-C138 C141-C144 C147-C150 C153-C156 C159-C162 C165-C168 C171-C174 C177-C180 = SparkFun-Capacitors; PROD_ID: CAP-08604
C4 C6-C8 C13 C14 C19 C20 C25 C26 C31 C32 C37 C38 C43 C44 C49 C50 C55 C56 C61 C62 C67 C68 C73 C74 C79 C80 C85 C86 C91 C92 C97 C98 C103 C104 C109 C110 C115 C116 C121 C122 C127 C128 C133 C134 C139 C140 C145 C146 C151 C152 C157 C158 C163 C164 C169 C170 C175 C176 = SparkFun-Capacitors; PROD_ID: CAP-09824
E$1 = SparkFun-Retired
E$4 E$5 FID1-FID60 LOGO1-LOGO60 U2 U4 U6 U7 U9 U11 U13 U15 U17 U19 U21 U23 U25 U27 U29 U31 U33 U35 U37 U39 U41 U43 U45 U47 U49 U51 U53 U55 U57 U59 = SparkFun-Aesthetics
JP1-JP90 = SparkFun-Connectors
Q1-Q30 = SparkFun-DiscreteSemi; PROD_ID: TRANS-09245
R1 R9 R14 R19 R24 R29 R34 R39 R44 R49 R54 R59 R64 R69 R74 R79 R84 R89 R94 R99 R104 R109 R114 R119 R124 R129 R134 R139 R144 R149 = SparkFun-Resistors; PROD_ID: RES-09383
R2 R8 R13 R18 R23 R28 R33 R38 R43 R48 R53 R58 R63 R68 R73 R78 R83 R88 R93 R98 R103 R108 R113 R118 R123 R128 R133 R138 R143 R148 = SparkFun-Resistors; PROD_ID: RES-10646
R3 R4 R6 R7 R11 R12 R16 R17 R21 R22 R26 R27 R31 R32 R36 R37 R41 R42 R46 R47 R51 R52 R56 R57 R61 R62 R66 R67 R71 R72 R76 R77 R81 R82 R86 R87 R91 R92 R96 R97 R101 R102 R106 R107 R111 R112 R116 R117 R121 R122 R126 R127 R131 R132 R136 R137 R141 R142 R146 R147 = SparkFun-Resistors; PROD_ID: RES-07863
R5 R10 R15 R20 R25 R30 R35 R40 R45 R50 R55 R60 R65 R70 R75 R80 R85 R90 R95 R100 R105 R110 R115 R120 R125 R130 R135 R140 R145 R150 = SparkFun-Resistors; PROD_ID: RES-00824
SJ1-SJ30 = SparkFun-Passives
STANDOFF1-STANDOFF120 = SparkFun-Electromechanical
U1 U3 U5 U8 U10 U12 U14 U16 U18 U20 U22 U24 U26 U28 U30 U32 U34 U36 U38 U40 U42 U44 U46 U48 U50 U52 U54 U56 U58 U60 = Testing; PROD_ID: IC-12445